# EAGLE board 3buttons-3lights-strip (EAGLE 9.6.2)
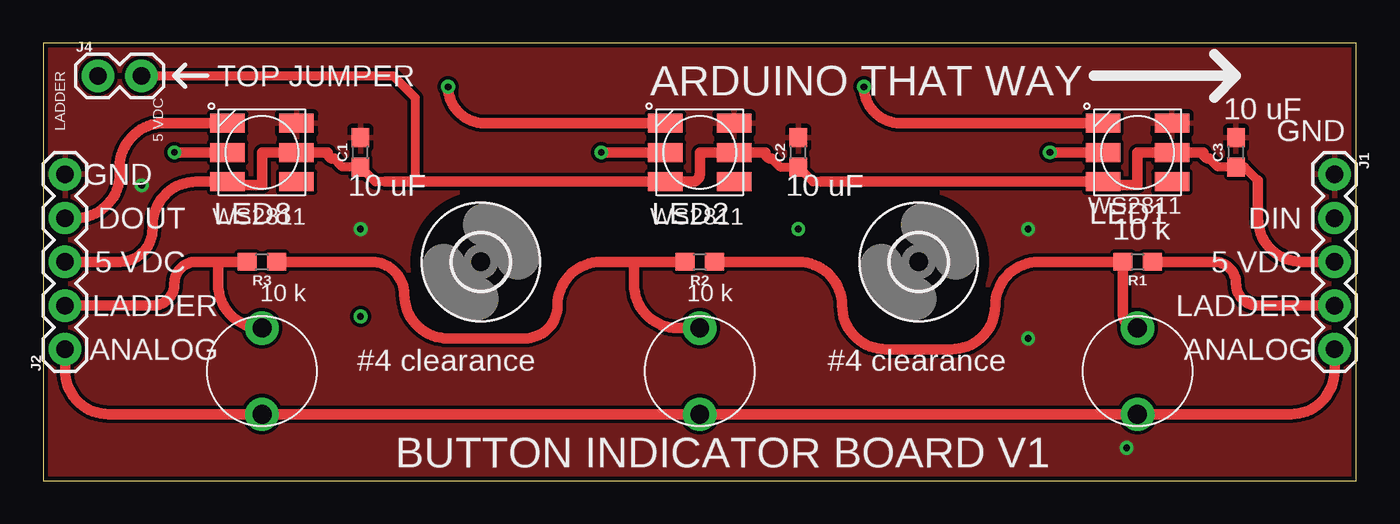
[diagram p0: board, top side]
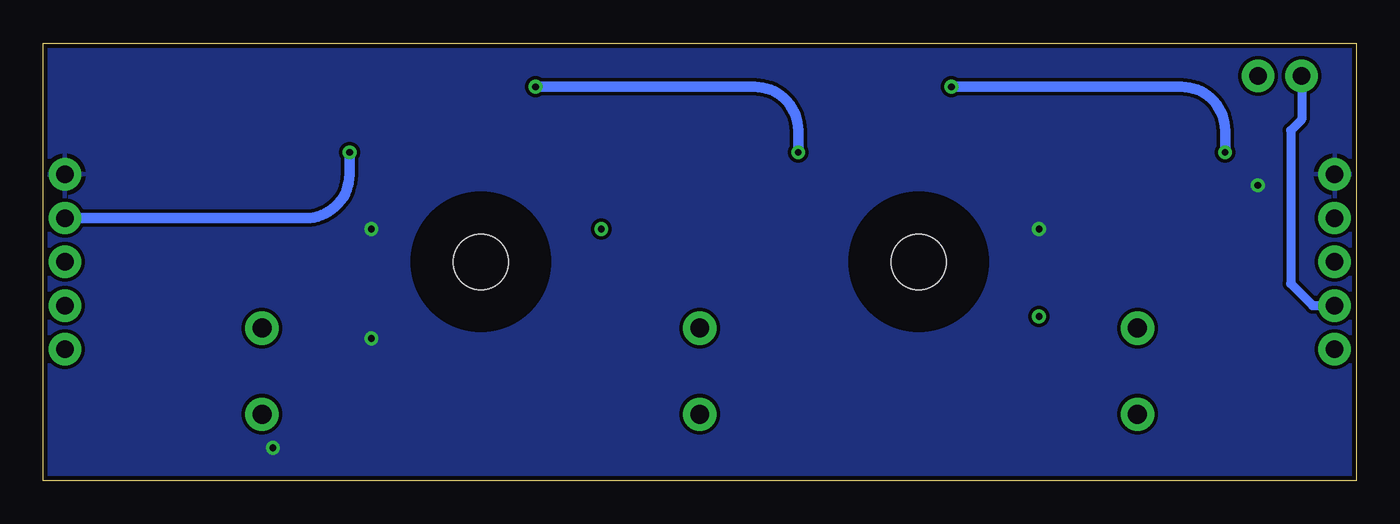
[diagram p1: board, bottom side, seen from below]

Size 76.2 x 25.4 mm. Coordinates in mm from the lower left corner, seen from the top.
Outline: 76.2,25.4 0,25.4 0,0 76.2,0 76.2,25.4
Copper layers (1*16): Top 0.035mm / dielectric 1.5mm / Bottom 0.035mm
Design rules "adafruit *": minimum track width 8mil, minimum drill 15.5mil, track to track 8mil, track to pad 8mil, pad to pad 8mil, via to via 8mil, smd to smd 8mil, copper to edge 10mil, drill to drill 8mil, minimum pad ring 10mil, minimum via ring 8mil, stop-mask expansion 4mil, vias tented up to drill 20mil, thermal gap 10mil

## Footprints (pad centres in the part's own frame; a part is rotated, then mirrored left to right if it is on the bottom)
0603 = smd 1.1 x 1: 1 -0.85,0; 2 0.85,0
3,2 = hole 3.2: 0,0
1X05 = drill 1.016 pad 1.88: 1 0,0; 2 2.54,0; 3 5.08,0; 4 7.62,0; 5 10.16,0
1X02 = drill 1.016 pad 1.88: 1 0,0; 2 2.54,0
WS28115050 = smd 2 x 1.1: DI 2,0; DO 2,-1.7; LEDVDD -2,0; NC -2,1.7; VDD 2,1.7; VSS -2,-1.7
BUTTON = drill 1.1 pad 1.93: P$1 -2.499,0; P$2 2.499,0

## Placement (x,y rotation side)
C1  10uF  [0603]  18.41,19.05 90 top
C2  10uF  [0603]  43.81,19.05 90 top
C3  10uF  [0603]  69.22,19.05 90 top
H3  MOUNT-HOLE3.2  [3,2]  50.8,12.7 180 top
H4  MOUNT-HOLE3.2  [3,2]  25.4,12.7 180 top
J1  [1X05]  74.93,17.78 270 top
J2  [1X05]  1.27,7.62 90 top
J4  [1X02]  3.17,23.5 0 top
LED1  WS28115050  [WS28115050]  63.5,19.05 180 top
LED2  WS28115050  [WS28115050]  38.1,19.05 180 top
LED8  WS28115050  [WS28115050]  12.7,19.05 180 top
R1  10k  [0603]  63.5,12.7 180 top
R2  10k  [0603]  38.1,12.7 180 top
R3  10k  [0603]  12.7,12.7 180 top
U$1  BUTTON  [BUTTON]  63.5,6.35 270 top
U$4  BUTTON  [BUTTON]  38.1,6.35 270 top
U$5  BUTTON  [BUTTON]  12.7,6.35 270 top

## Library data of the parts
C1-C3 = SparkFun-Capacitors; PROD_ID: CAP-11015
H3 H4 = holes
J1 J2 J4 = SparkFun-Connectors
LED1 LED2 LED8 = microbuilder
R1-R3 = SparkFun-Resistors; PROD_ID: RES-00824
U$1 U$4 U$5 = spietz-library-2

## Nets
+5V: C1.1 C2.1 C3.1 J1.3 J2.3 J4.2 LED1.LEDVDD LED1.VDD LED2.LEDVDD LED2.VDD LED8.LEDVDD LED8.VDD
BUTTON: J1.5 J2.1 U$1.P$2 U$4.P$2 U$5.P$2
GND: C1.2 C2.2 C3.2 J1.1 J2.5 LED1.VSS LED2.VSS LED8.VSS
N$1: LED1.DO LED2.DI
N$2: R1.2 R2.1 U$1.P$1
N$3: R2.2 R3.1 U$4.P$1
N$4: J2.2 J4.1 R3.2 U$5.P$1
N$5: J1.4 R1.1
N$7: LED2.DO LED8.DI
N$8: J1.2 LED1.DI
N$9: J2.4 LED8.DO

## Tracks (layer width: path | path; a pad name or v marks a point on that pad's centre or on a via)
+5V
  Top 0.508: J4.2 20.32,23.5 21.59,22.23 21.59,17.35 | 45.15,17.35 44.66,17.35 C2.1 42.76,18.2 42.27,18.68 | 67.67,18.68 68.16,18.2 C3.1 69.7,18.2 70.48,17.41 | 19.88,17.35 19.27,17.35 C1.1 17.36,18.2 16.88,18.68
  Top 0.61: J1.3 73.03,12.7 arc-90 70.48,15.24 70.48,17.41 | 45.15,17.35 LED1.VDD arc90 61.7,17.14 63.5,17.14 63.5,19.05 LED1.LEDVDD 67.31,19.05 arc90 67.67,18.68 | 42.27,18.68 arc-90 41.91,19.05 LED2.LEDVDD 38.1,19.05 38.1,17.78 arc-90 37.67,17.35 LED2.VDD 21.59,17.35 19.88,17.35 | 16.88,18.68 arc-90 16.51,19.05 LED8.LEDVDD 12.7,19.05 12.7,17.14 10.9,17.14 arc-90 LED8.VDD 8.89,17.35 arc90 6.35,14.81 6.35,14.61 arc-90 4.45,12.7 J2.3
BUTTON
  Top 0.61: J1.5 74.93,6.39 arc-90 72.39,3.85 U$1.P$2 U$4.P$2 U$5.P$2 3.81,3.85 arc-90 1.27,6.39 J2.1
GND  (via drill 0.39)
  other vias: 62.87,1.91 57.15,8.26 57.15,14.61 18.41,14.61 5.71,17.14
  pour Top: 76.2,0 76.2,25.4 0,25.4 0,0
  pour Bottom: 76.2,0 76.2,25.4 0,25.4 0,0
N$1  (via drill 0.39)
  Top 0.61: LED1.DO 49.73,20.75 arc-90 v47.62,22.86 | v32.38,19.05 LED2.DI
  Bottom 0.61: v47.62,22.86 34.92,22.86 arc90 32.38,20.32 v32.38,19.05
N$2
  Top 0.61: R2.1 43.81,12.7 arc-90 46.35,10.16 arc90 48.9,7.62 52.7,7.62 arc90 55.24,10.16 arc-90 57.78,12.7 R1.2 62.65,9.7 arc90 U$1.P$1
N$3
  Top 0.61: R2.2 34.29,12.7 | 34.29,12.7 32.38,12.7 arc90 29.84,10.16 arc-90 27.94,8.26 23.5,8.26 arc-90 20.95,10.79 arc90 19.05,12.7 R3.1 | U$4.P$1 36.83,8.85 arc-90 34.29,11.39 34.29,12.7
N$4
  Top 0.61: R3.2 10.16,12.7 | 10.16,12.7 8.89,12.7 arc90 7.62,11.43 arc-90 6.35,10.16 J2.2 | U$5.P$1 arc-90 10.16,11.39 10.16,12.7
  Bottom 0.508: J4.1 3.17,20.95 3.81,20.32 3.81,11.43 2.54,10.16 J2.2
N$5
  Top 0.61: J1.4 70.48,10.16 arc-90 69.22,11.43 arc90 67.94,12.7 R1.1
N$7  (via drill 0.39)
  Top 0.61: LED2.DO 25.61,20.75 arc-90 v23.5,22.86 | LED8.DI v7.62,19.05
  Bottom 0.61: v23.5,22.86 10.16,22.86 arc90 7.62,20.32 v7.62,19.05
N$8  (via drill 0.39)
  Top 0.61: LED1.DI v58.42,19.05
  Bottom 0.61: J1.2 60.96,15.24 arc-90 58.42,17.78 v58.42,19.05
N$9
  Top 0.61: LED8.DO 6.99,20.75 arc90 4.45,18.21 4.45,17.78 arc-90 1.91,15.24 J2.4
N$11  (via drill 0.39)
  other vias: 43.81,14.61
N$13  (via drill 0.39)
  other vias: 18.41,9.53

## Text on the board
tPlace: TOP JUMPER | ARDUINO THAT WAY | 5 VDC | 10 uF | GND | LADDER | GND | 10 uF | 10 uF | WS2811 | DOUT | WS2811 | WS2811 | DIN | 10 k | 5 VDC | 5 VDC | LADDER | 10 k | 10 k | LADDER | ANALOG | #4 clearance | #4 clearance | ANALOG | BUTTON INDICATOR BOARD V1